# Altium PCB OptoGrid_Main_V0.05.pcbdoc
Units mil, origin at the board's own origin, x right, y up, seen from the top; angles counter-clockwise.
Board outline 409.45 x 625.98 mil, 2 copper layers (Top Layer, Bottom Layer); 21 components, 38 nets, 115 pads, 26 vias.
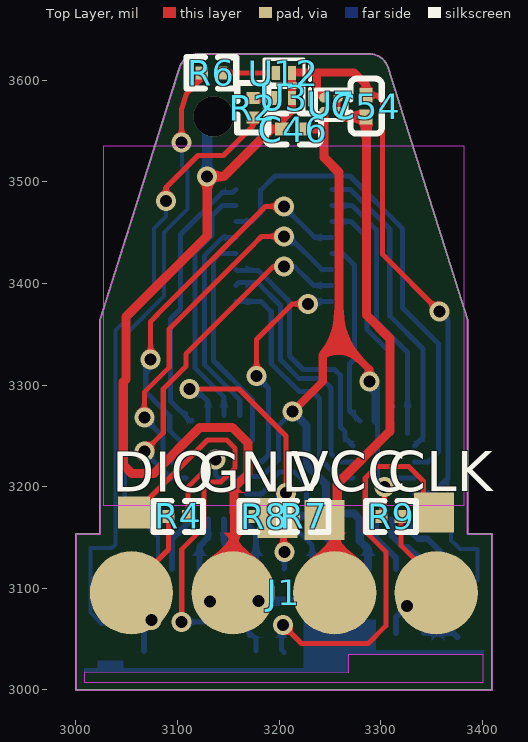
[diagram p0: Top Layer view]
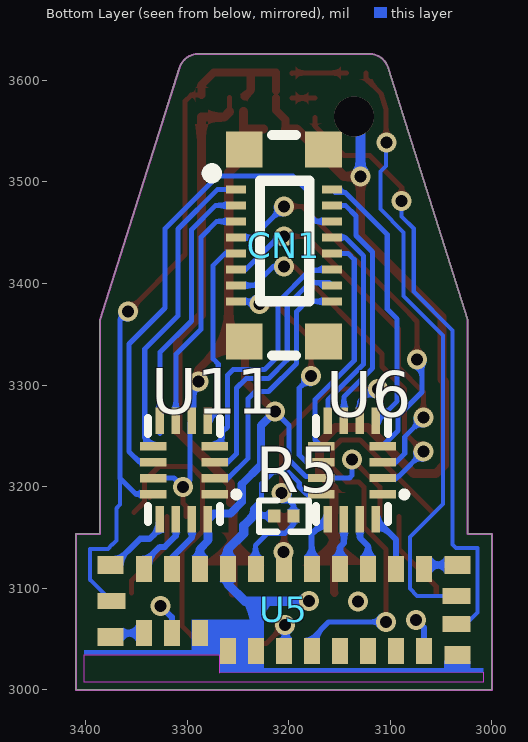
[diagram p1: Bottom Layer view, seen from below]

## Layer stack, top to bottom
Top Layer: signal copper (thickness not stored)
Dielectric: dielectric 12.6, FR-4, Dk 4.8
Bottom Layer: signal copper (thickness not stored)

## Board outline
3385.7,3363.89 3307.49,3612.21 ccw(c3288.71,3606.3) 3288.71,3625.98 3120.74,3625.98 ccw(c3120.74,3606.3) 3101.96,3612.21 3023.75,3363.89 3023.75,3153.54 3000,3153.54 3000,3000 3409.45,3000 3409.45,3153.54 3385.7,3153.54

## Design rules (kind name [scope] priority, off if disabled: settings)
BoardOutlineClearance copperThickness1oz [All] p0: genericclearance=10 ignorepadtopadclearanceinfootprint=FALSE except(0: Arc-SplitContinuation Track-SplitContinuation SMDPad-SplitContinuation THPad-SplitContinuation Via-SplitContinuation Fill-SplitContinuation Poly-SplitContinuation Region-SplitContinuation Text-SplitContinuation; 6: SMDPad-CutoutEdge THPad-CutoutEdge Via-CutoutEdge Fill-CutoutEdge Region-CutoutEdge; 11.8: Track-OutlineEdge SMDPad-OutlineEdge THPad-OutlineEdge Via-OutlineEdge Fill-OutlineEdge Region-OutlineEdge Poly-OutlineEdge Text-OutlineEdge Track-CutoutEdge)
BoardOutlineClearance copperThickness2oz [All] p0: genericclearance=10 ignorepadtopadclearanceinfootprint=FALSE except(0: Arc-SplitContinuation Track-SplitContinuation SMDPad-SplitContinuation THPad-SplitContinuation Via-SplitContinuation Fill-SplitContinuation Poly-SplitContinuation Region-SplitContinuation Text-SplitContinuation; 6: SMDPad-CutoutEdge THPad-CutoutEdge Via-CutoutEdge Fill-CutoutEdge Region-CutoutEdge; 11.8: Track-OutlineEdge SMDPad-OutlineEdge THPad-OutlineEdge Via-OutlineEdge Fill-OutlineEdge Region-OutlineEdge Poly-OutlineEdge Text-OutlineEdge Track-CutoutEdge)
Clearance copperThickness1oz [(InNet('VCC') OR InNet('GND') OR InNet('STATUS_LED') OR InNet('X4') OR InNet('Y2') OR InNet('Y3') OR InNet('X6') OR InNet('Y1') OR InNet('Y4') OR InNet('Y5') OR InNet('X8') OR InNet('Y6') OR InNet('Y7') OR InNet('X7') OR InNet('X5') OR InNet('Y8') OR InNet('X3') OR InNet('X2') OR InNet('X1') OR InNet('AX2') OR InNet('AX1') OR InNet('AX0') OR InNet('SHAM_LED') OR InNet('$1N29965') OR InNet('$1N29971') OR InNet('AY2') OR InNet('AY0') OR InNet('AY1') OR InNet('MUX_EN_PWM') OR InNet('BAT+') OR InNet('SWDCLK') OR InNet('SWDIO') OR InNet('CURRENT_SENSING_ADC') OR InNet('VBAT_ADC') OR InNet('$1N46797') OR InNet('$1N46842') OR InNet('SCL') OR InNet('SDA'))] p1: gap=7 ignorepadtopadclearanceinfootprint=FALSE except(3.9: Track-SMDPad; 4: Track-Track; 6: SMDPad-SMDPad Track-THPad SMDPad-THPad THPad-THPad Track-Via SMDPad-Via THPad-Via Via-Via Track-Fill SMDPad-Fill THPad-Fill Via-Fill Fill-Fill SMDPad-Region THPad-Region Via-Region Fill-Region Region-Region Track-Poly SMDPad-Poly THPad-Poly Via-Poly Fill-Poly Poly-Poly Track-Text SMDPad-Text THPad-Text Via-Text Fill-Text Region-Text Poly-Text Text-Text; 6.9: Track-Hole SMDPad-Hole THPad-Hole Via-Hole Fill-Hole Region-Hole Poly-Hole Text-Hole Sheet-Hole; 11.8: Track-Region Region-Poly Track-Sheet SMDPad-Sheet THPad-Sheet Via-Sheet Fill-Sheet Region-Sheet Poly-Sheet Text-Sheet)
Clearance copperThickness2oz [All] p1: gap=7 ignorepadtopadclearanceinfootprint=FALSE except(6: Track-SMDPad SMDPad-SMDPad Track-THPad SMDPad-THPad THPad-THPad Track-Via SMDPad-Via THPad-Via Via-Via Track-Fill SMDPad-Fill THPad-Fill Via-Fill Fill-Fill SMDPad-Region THPad-Region Via-Region Fill-Region Region-Region Track-Poly SMDPad-Poly THPad-Poly Via-Poly Fill-Poly Poly-Poly Track-Text SMDPad-Text THPad-Text Via-Text Fill-Text Region-Text Poly-Text Text-Text; 6.9: Track-Hole SMDPad-Hole THPad-Hole Via-Hole Fill-Hole Region-Hole Poly-Hole Text-Hole Sheet-Hole; 8: Track-Track; 11.8: Track-Region Region-Poly Track-Sheet SMDPad-Sheet THPad-Sheet Via-Sheet Fill-Sheet Region-Sheet Poly-Sheet Text-Sheet)
DiffPairsRouting differentialPair [All] p1: maxuncoupledlength=10 minlimit=6 maxlimit=6 mostfreqgap=6 toplayer_minwidth=5 toplayer_prefwidth=10 toplayer_maxwidth=100 bottomlayer_minwidth=5 bottomlayer_prefwidth=10 bottomlayer_maxwidth=100
PasteMaskExpansion pasteMaskExpansion [All] p1: expansion=0
PlaneConnect innerPlane [All] p1: planeconnectstyle=Relief reliefexpansion=20 reliefentries=4 reliefconductorwidth=10 reliefairgap=10
PolygonConnect copperRegion [All] p1: connectstyle=Relief reliefentries=4 reliefconductorwidth=10 polygonreliefangle="90 Angle" airgapwidth=10
RoutingVias viaSize [All] p1: viastyle="Through Hole" holewidth=12 minholewidth=11.8 maxholewidth=248 width=24 minwidth=19.7 maxwidth=393.7
SolderMaskExpansion solderMaskExpansion [All] p1: useseparateexpansions=TRUE expansion=2 expansionbottom=2
Width copperThickness1oz [All] p1: maxlimit=100 minlimit=4 preferedwidth=10
Width copperThickness2oz [All] p1: maxlimit=100 minlimit=8 preferedwidth=10

## Components (designator, comment, footprint, x,y, rotation, side; value= is the part's Value field where it differs from the comment)
C46 "GRM033R61A225KE47D" C0201 3214.05,3552 r0 top
C54 "GRM033R61A225KE47D" C0201 3285.72,3574.54 r90 top
CLK "Test-Point" Test-Point-0.5mm#1 3333.7,3182.3 r0 top
CN1 "YXT-BB10-16S-02" CONN-SMD_YXT-BB10-16S-02 3204.72,3437.55 r90 bottom locked
DIO "Test-Point" Test-Point-0.5mm#2 3081.28,3174.54 r0 top
GND "Test-Point" Test-Point-0.5mm#1 3179.81,3177.14 r0 top
J1 "811-22-004-30-002101" 811-22-004-30-002101 3204.72,3095.55 r180 top
R2 "RC0201FR-07220RL" R0201 3174.25,3572.9 r270 top
R4 "AF0201FR-074K7L" R0201 3100.72,3170.64 r0 top
R5 "0201WMF715JTEE" R0201 3204.72,3171.04 r180 bottom
R6 "NQ01WMJ0820TEE" R0201 3133.39,3607.27 r180 top
R7 "RC0201FR-071ML" R0201 3224.33,3170.65 r0 top
R8 "RC0201FR-071ML" R0201 3185.47,3170.65 r0 top
R9 "AF0201FR-074K7L" R0201 3310.32,3170.64 r180 top
U3 "RED LED" BLUE_LED_KINGBRIGHT_0201 3204.72,3582.65 r180 top
U5 "HY0020" HY0020_footprint_NoFilling 3204.72,3076.64 r180 bottom locked
U6 "TMUX1208RSVR" UTQFN-16_L2.6-W1.8-P0.40-BL 3137.8,3216.36 r90 bottom locked
U7 "NCP163AFCT330T2G" WLCSP-4_L0.6-W0.6-P0.35-R2-C2-TL 3251.22,3575.94 r180 top
U11 "TMUX1208RSVR" UTQFN-16_L2.6-W1.8-P0.40-BL 3303.07,3216.34 r90 bottom locked
U12 "BLUE LED" BLUE_LED_KINGBRIGHT_0201 3204.72,3606.94 r180 top
VCC "Test-Point" Test-Point-0.5mm#1 3226.17,3174.81 r0 top

## Footprints (in the part's own frame and the unit in brackets; to place one, negate y for a bottom-side part, rotate by r counter-clockwise, add the part's x,y. Pads: shape width x height; smd on the part's side, far side on the other; paste and mask are expansions set on the pad)
811-22-004-30-002101 [mm]
  round 2.08 smd: 1(-3.81,0) 2(-1.27,0) 3(1.27,0) 4(3.81,0)
BLUE_LED_KINGBRIGHT_0201 [mm]
  rect 0.2x0.35 smd: 1(-0.2,0) 2(0.2,0)
  silkscreen extent -0.65,-0.35 0.5,0.35
C0201 [mil]
  rect 14.51x12.76 smd: 1(-10.8,0) 2(10.8,0)
  silkscreen extent -27,-15 27,15
CONN-SMD_YXT-BB10-16S-02 [mm]
  rect 0.2x0.5 smd: 1(1.4,1.2) 2(1.4,-1.2) 3(1,1.2) 4(1,-1.2) 5(0.6,1.2) 6(0.6,-1.2) 7(0.2,1.2) 8(0.2,-1.2) 9(-0.2,1.2) 10(-0.2,-1.2) 11(-0.6,1.2) 12(-0.6,-1.2) 13(-1,1.2) 14(-1,-1.2) 15(-1.4,1.2) 16(-1.4,-1.2)
  rect 0.9x0.92 smd: 17(-2.4,0.99) 18(-2.4,-0.99) 19(2.4,0.99) 20(2.4,-0.99)
  silkscreen extent -2.76,-0.64 2.76,1.93
HY0020_footprint_NoFilling [mm]
  rect 0.4x0.65 smd: 1(-3.5,1.075) 2(-2.8,1.075) 3(-2.1,1.075) 4(-1.4,1.075) 5(-0.7,1.075) 6(0,1.075) 7(0.7,1.075) 8(1.4,1.075) 9(2.1,1.075) 10(2.8,1.075) 11(3.5,1.075) 16(3.5,-0.975) 17(2.8,-0.975) 18(2.1,-0.975) 19(1.4,-0.975) 20(0.7,-0.975) 21(0,-0.975) 22(-0.7,-0.975) 23(-1.4,-0.975) 24(-2.1,-0.525) 25(-2.8,-0.525) 26(-3.5,-0.525)
  rect 0.65x0.45 smd: 12(4.335,1.175) 15(4.335,-1.075) 27(-4.335,-0.625) 29(-4.335,1.175)
  rect 0.7x0.4 smd: 13(4.31,0.4) 14(4.31,-0.3) 28(-4.31,0.275)
  Board Outline Layer region: -4.987,-1.733 -4.986,-1.063 -4.983,-1.063 -1.613,-1.063 -1.613,-1.067 -1.613,-1.514 4.986,-1.512 4.986,-1.734 4.986,-1.754 -4.987,-1.755
R0201 [mil]
  rect 11.93x12.76 smd: 1(-9.51,0) 2(9.51,0)
  silkscreen extent -24,-15 24,15
Test-Point-0.5mm#1 [mm]
  rect 1x1 smd: 1(0.474,-0.197)
Test-Point-0.5mm#2 [mm]
  rect 0.8x0.8 smd: 1(-0.614,0)
UTQFN-16_L2.6-W1.8-P0.40-BL [mm]
  rect 0.21x0.665 smd: 1(-0.6,-0.768) 2(-0.2,-0.768) 3(0.2,-0.768) 4(0.6,-0.768) 9(0.6,0.768) 10(0.2,0.768) 11(-0.2,0.768) 12(-0.6,0.768)
  rect 0.665x0.21 smd: 5(1.232,-0.6) 6(1.232,-0.2) 7(1.232,0.2) 8(1.232,0.6) 13(-1.232,0.6) 14(-1.232,0.2) 15(-1.232,-0.2) 16(-1.232,-0.6)
  silkscreen extent -1.3,-1.38 1.3,0.9
WLCSP-4_L0.6-W0.6-P0.35-R2-C2-TL [mm]
  round 0.25 smd: A1(-0.175,0.175) A2(0.175,0.175) B1(-0.175,-0.175) B2(0.175,-0.175)
  silkscreen extent -0.38,-0.38 0.38,0.38

## Via types
v1: diameter 19.68, hole 11.81, Top Layer to Bottom Layer, 25 vias
v2: diameter 39.37, hole 39.37, Top Layer to Bottom Layer, 1 vias

## Nets (pads, with @x,y where several pads share a name; then routed paths per layer and width w, separated by ;. In a path a pad name is that pad's centre, name@x,y a point inside that pad or via, vN(x,y) a via of type N, cw(c..) or ccw(c..) an arc to the next point about the centre after c; other vN are vias at no path point)
$1N29965: U5.26 U5.27 | length 34.5
  Bottom Layer w6: U5.26 3371.46,3055.97 U5.27
$1N29971: U5.11 U5.12 | length 34.5
  Bottom Layer w6: U5.12 3062.99,3122.9 U5.11
$1N46797: R2.1 U3.2 | length 22.7
  Top Layer w5: R2.1 3196.62,3582.41 U3.2
$1N46842: R6.1 U12.2 | length 54.1
  Top Layer w5: R6.1 3196.51,3607.27 U12.2
AX0: U5.9 U6.15 | length 52.3
  Bottom Layer w6: U5.9 3121.82,3119.18 3121.82,3141.54 3129.93,3149.64 U6.15
AX1: U5.8 U6.14 | length 50.5
  Bottom Layer w6: U6.14 3145.67,3144.39 3149.61,3140.45 U5.8
AX2: U5.7 U6.13 | length 56.5
  Bottom Layer w6: U6.13 3163.11,3167.85 3177.32,3153.64 3177.32,3119.12 U5.7
AY0: U5.2 U11.15 | length 57.1
  Bottom Layer w6: U11.15 3295.2,3149.86 3314.96,3130.1 U5.2
AY1: U5.1 U11.14 | length 64.9
  Bottom Layer w6: U11.14 3310.94,3151.62 3321.82,3140.74 3326.82,3140.74 3342.52,3125.04 U5.1
AY2: U5.29 U11.13 | length 72.6
  Bottom Layer w6: U11.13 3326.69,3158.87 3336.82,3148.74 3346.11,3148.74 3371.96,3122.9 U5.29
BAT+: C54.1 J1.2 R7.2 U7.A1 U7.B1 VCC.1 | length 533.2
  Top Layer w5: U7.A1 U7.B1
  Top Layer w9: VCC.1@3254.33,3174.54 3254.72,3174.14 J1.2 ; VCC.1@3257.2,3184.41 3257.2,3202.6 3309.12,3254.52 3309.12,3345.84 3285.92,3369.04 3285.92,3563.74 3263.55,3563.74 U7.A1@3258.24,3569.05
CURRENT_SENSING_ADC: R5.2 U5.5 U6.6 | length 317.7
  Top Layer w5: v1(3111.97,3296.17) 3160.59,3296.17 3206.9,3249.86 v1(3206.9,3193.54)
  Bottom Layer w5: v1(3111.97,3296.17) 3117.99,3296.17 3129.93,3284.24 U6.6 ; v1(3206.9,3193.54) 3195.21,3181.85 R5.2 3195.21,3162.75 3203.84,3154.12 3220.74,3154.12 3232.62,3142.24 3232.62,3119.3 U5.5
GND: C46.1 C54.2 CN1.20 GND.1 J1.3 R5.1 R8.1 U3.1 U5.4 U5.15 U5.22 U5.23 U5.24 U5.28 U6.12 U7.B2 U11.12 U12.1 | length 1888.1
  Top Layer w5: C54.2@3288.92,3585.34 3296,3585.34 3301.93,3579.4 3301.93,3428.47 v1(3357.98,3372.42)
  Top Layer w8: J1.3 3155.51,3096.34 3155.51,3174.54 ; C46.1 3203.25,3561.17 3212.6,3570.51 U3.1 ; 3212.6,3589.65 3212.6,3607.48 3273.78,3607.48 3285.72,3595.54 C54.2 ; 3237.27,3591.12 3237.27,3605.85 3237.55,3606.13 ; 3237.51,3589.65 U7.B2@3243.25,3583.91
  Top Layer w9: 3155.51,3174.54 3155.51,3198.85 3169.52,3212.86 3169.52,3242.64 3153.82,3258.34 3122.22,3258.34 3076.72,3212.84 3055.22,3212.84 3046.62,3221.44 3046.62,3303.14 3049.22,3305.74 3049.22,3367.04 3129.28,3447.09 v1(3129.28,3505.31) 3145.55,3505.31 3192.23,3552 C46.1
  Bottom Layer w4: 3365.82,3207.94 3365.82,3182.34 3369.42,3178.74 3369.42,3147.01 3373.49,3142.94 3373.84,3142.94 3378.02,3138.76 3395.33,3138.76 3395.33,3108.39 U5.28
  Bottom Layer w5: U6.12 3182.61,3192.73 3189.59,3199.7 3189.59,3203.8 3200.02,3214.24 3215.52,3214.24 3226.82,3202.94 3226.82,3187.24 3235.22,3178.84 3235.22,3170.71 ; R5.1@3216.96,3171.31 3234.62,3171.31 3235.22,3170.71 ; 3236.84,3169.1 3235.22,3170.71 ; U11.12 3350.6,3192.71 3365.82,3207.94 3366.12,3208.24 3366.12,3364.27 v1(3357.98,3372.42)
  Bottom Layer w9: v1(3179.74,3087.25) 3232.17,3087.25 ; U5.22 3232.17,3038.36 3232.17,3087.25 ; 3236.84,3169.1 3244.22,3161.71 3244.22,3153.94 3259.84,3138.32 U5.4 3259.84,3104.15 ; 3259.82,3104.14 3242.94,3087.25 3232.17,3087.25
  Bottom Layer w10: v1(3129.28,3505.31) 3129.28,3557.93 v2(3135.7,3564.35)
  other v1: 3131.8,3087.11
MUX_EN_PWM: U5.10 U6.16 | length 57
  Bottom Layer w6: U5.10 3094.49,3148.16 U6.16
SCL: J1.1 R9.1 U5.25 | length 120.8
  Top Layer w5: R9.1 3319.83,3142.33 3354.72,3107.44 J1.1
  Bottom Layer w6: U5.25 3314.96,3071.46 v1(3326.09,3082.59)
SDA: J1.4 R4.1 U5.16 | length 123.9
  Top Layer w5: J1.4 3054.72,3101.74 3091.21,3138.23 R4.1
  Bottom Layer w6: U5.16 3066.93,3061.16 v1(3074.57,3068.8)
SHAM_LED: R6.2 U5.13 | length 605.1
  Top Layer w5: v1(3103.82,3538.65) 3104.12,3538.95 3104.12,3571.44 3108.98,3586.84 3123.88,3601.75 R6.2
  Bottom Layer w4: U5.13@3034.84,3092.38 3073.5,3092.38 3080.71,3099.59 3080.71,3150.25 3048.12,3182.84 3048.12,3348.94 3086.92,3387.74 3086.92,3450.34 3109.72,3473.14 3109.72,3510.14 3104.32,3515.54 3104.32,3537.95 v1@3103.62,3538.65
STATUS_LED: R2.2 U5.14 | length 606.2
  Top Layer w5: v1(3088.72,3481.34) 3088.72,3494.54 3120.22,3526.04 3145.42,3526.04 3174.25,3554.87 R2.2
  Bottom Layer w4: U5.14 3025.44,3064.82 3014.27,3075.99 3014.27,3139.74 3035.33,3139.74 3038.84,3143.25 3038.84,3353.85 3076.87,3391.89 3076.87,3454.19 3088.72,3466.04 v1(3088.72,3481.34)
SWDCLK: CLK.1 U5.21 | length 403.9
  Top Layer w5: v1(3203.74,3064.04) 3222.14,3045.64 3287.72,3045.64 3305.12,3063.04 3305.12,3135.84 3284.82,3156.14 3284.82,3208.64 3295.92,3219.74 3327.72,3219.74 3341.92,3205.54 3341.92,3184.97 CLK.1 ; CLK.1@3336.96,3189.17 CLK.1@3336.96,3189.94
  Bottom Layer w5: v1@3202.48,3065.93 3202.48,3039.49 U5.21@3205,3036.97
SWDIO: DIO.1 U5.20 | length 424.2
  Top Layer w5: DIO.1 3058.22,3174.54 3129.62,3245.94 3148.52,3245.94 3156.82,3237.64 3156.82,3218.64 3142.96,3204.77 3131.19,3204.77 3125.92,3199.5 3125.92,3160.04 3104.2,3138.31 v1(3104.2,3066.84)
  Bottom Layer w5: v1(3104.2,3066.84) 3160.72,3066.84 3177.17,3050.39 U5.20
VBAT_ADC: R7.1 R8.2 U5.6 | length 72.1
  Top Layer w6: R8.2 3204.35,3170.65 ; v1(3205.17,3135.79) 3204.35,3136.61 3204.35,3170.65 ; R7.1 3204.35,3170.65
  Bottom Layer w5: U5.6 3205.17,3119.41 v1(3205.17,3135.79)
VCC: C46.2 R4.2 R9.2 U5.3 U6.11 U7.A2 U11.6 U11.11 U11.16 | length 969.2
  Top Layer w5: R4.2 3110.23,3199.43 v1(3137.46,3226.66) ; R9.2 3300.81,3180.51 3303.88,3183.58 v1(3303.88,3199.49)
  Top Layer w8: v1(3213.42,3273.94) 3243.02,3303.54 3243.02,3329.3 3259.02,3345.3 3288.8,3315.52 v1(3288.8,3303.45)
  Top Layer w9: C46.2 3243.91,3552 3244.33,3552.43 ; U7.A2 3244.33,3552.43 ; 3259.02,3345.3 3259.02,3509.24 3244.33,3523.93 3244.33,3552.43
  Bottom Layer w5: v1(3137.46,3226.66) 3137.46,3211.1 3140.08,3208.48 U6.11 3169.39,3209.84 3182.87,3209.84 3199.62,3226.59 3199.62,3260.14 v1(3213.42,3273.94) ; U11.6 3297.02,3263.02 3297.02,3206.35 v1(3303.88,3199.49) 3312.88,3208.49 U11.11
  Bottom Layer w8: v1(3213.42,3273.94) 3227.12,3260.24 3227.12,3221.34 3246.12,3202.34 3246.12,3184.84 3257.32,3173.64 3273.64,3173.64 U11.16 3279.45,3146.71 3287.4,3138.76 U5.3 ; v1(3288.8,3303.45) 3295.2,3297.04 U11.6
X1: CN1.2 U6.5 | length 270.1
  Bottom Layer w5: U6.5 3112.5,3264.85 3093.22,3284.12 3093.22,3365.14 3102.92,3374.84 3102.92,3448.29 3143.97,3489.34 3154.15,3489.34 CN1.2
X2: CN1.4 U6.7 | length 242.6
  Bottom Layer w5: U6.7@3145.62,3270.3 3145.62,3288.44 3117.39,3316.67 3117.39,3430.93 3133.72,3447.26 3133.72,3466.34 3144.3,3476.91 CN1.4
X3: CN1.8 U6.8 | length 210
  Bottom Layer w5: CN1.8 3144.63,3445.42 3126.41,3427.2 3126.41,3320.4 3161.32,3285.49 U6.8@3161.32,3270.3
X4: CN1.10 U6.9 | length 226.6
  Bottom Layer w5: CN1.10 3141.64,3429.67 3135.42,3423.46 3135.42,3324.14 3174.03,3285.53 3174.03,3245.97 U6.9
X5: CN1.7 U6.4 | length 378.8
  Top Layer w5: v1(3073.6,3325.2) 3073.6,3362.59 3080.94,3369.93 3080.94,3370.23 3186.54,3475.84 v1@3204.8,3475.84
  Bottom Layer w5: v1(3073.6,3325.2) 3068.82,3320.43 3068.82,3293.24 3092.42,3269.64 3092.42,3255.1 U6.4 ; v1(3204.72,3475.84) 3235.14,3445.42 CN1.7
X6: CN1.15 U6.10 | length 232.7
  Top Layer w5: v1(3177.87,3308.75) 3177.87,3344.78 3212.94,3379.85 v1(3228.7,3379.85)
  Bottom Layer w5: U6.10 3182.7,3224.22 3189.61,3231.12 3189.61,3297.01 v1(3177.87,3308.75) ; v1(3228.7,3379.85) 3231.28,3382.42 CN1.15
X7: CN1.11 U6.3 | length 377
  Top Layer w5: v1(3067.4,3268.07) 3067.4,3292.92 3091.92,3317.44 3091.92,3355.19 3175.53,3438.79 3175.53,3439.02 3182.77,3446.27 v1(3204.7,3446.27)
  Bottom Layer w5: v1(3067.4,3268.07) 3067.4,3267.37 3085.72,3249.05 3085.72,3232.58 3094.09,3224.22 U6.3 ; v1(3204.7,3446.27) 3209.6,3446.27 3241.94,3413.92 CN1.11
X8: CN1.13 U6.2 | length 351.7
  Top Layer w5: v1(3067.4,3234.46) 3086.02,3253.08 3086.02,3296.14 3108.22,3318.34 3108.22,3330.54 3194.54,3416.85 v1@3204.5,3416.85
  Bottom Layer w5: v1(3067.4,3234.46) 3090.77,3211.1 3090.99,3211.1 3093.64,3208.44 U6.2@3108.48,3208.44 ; v1(3204.72,3416.54) 3215.42,3416.54 3233.79,3398.17 CN1.13
Y1: CN1.1 U11.9 | length 303.7
  Bottom Layer w5: CN1.1 3269.8,3492.66 3308.92,3453.54 3308.92,3368.24 3341.62,3335.54 3341.62,3248.27 U11.9
Y2: CN1.3 U11.8 | length 266.8
  Bottom Layer w5: CN1.3 3271.78,3476.91 3295.72,3452.97 3295.72,3363.14 3326.52,3332.34 U11.8@3326.52,3252.57
Y3: CN1.5 U11.7 | length 231.7
  Bottom Layer w5: CN1.5@3252.01,3461.12 3270.85,3461.12 3286.37,3445.6 3286.37,3354.84 3310.82,3330.38 3310.82,3283.05 3310.94,3282.94 U11.7
Y4: CN1.6 U11.10 | length 479.2
  Bottom Layer w5: CN1.6 3173.15,3461.16 3181.92,3469.94 3181.92,3491.84 3195.92,3505.84 3269.72,3505.84 3321.62,3453.94 3321.62,3375.94 3357.11,3340.45 3357.11,3234.42 3346.89,3224.2 U11.10
Y5: CN1.9 U11.5 | length 186.5
  Bottom Layer w5: CN1.9 3262.45,3429.67 3274.3,3417.82 3274.3,3325.84 3269.3,3320.84 3269.3,3274.97 U11.5
Y6: CN1.14 U11.3 | length 259.2
  Bottom Layer w5: CN1.14 3160.38,3401.07 3178.64,3401.07 3201.36,3378.35 3201.36,3324.83 3219.87,3306.32 3242.07,3306.32 3251.26,3297.14 3251.26,3232.3 3259.36,3224.2 U11.3
Y7: CN1.16 U11.2 | length 251.8
  Bottom Layer w5: CN1.16 3182.14,3382.42 3192.34,3372.22 3192.34,3321.09 3219.8,3293.64 3232.92,3293.64 3239.82,3286.74 3239.82,3227.98 3259.37,3208.44 U11.2@3272.81,3208.44
Y8: CN1.12 U11.4 | length 252.3
  Bottom Layer w5: CN1.12 3158.47,3412.94 3179.52,3412.94 3210.37,3382.09 3210.37,3328.56 3223.6,3315.34 3254.62,3315.34 3260.29,3309.67 3260.29,3258.67 3265.02,3253.94 3265.02,3247.76 U11.4
pads on no net: CN1.17 CN1.18 CN1.19 U5.17 U5.18 U5.19 U6.1 U11.1

## Keep-outs
Top Layer:
  region: 3027.58,3535.49 3381.91,3535.49 3381.91,3181.16 3027.58,3181.16
Board Outline Layer:
  the board outline again, w1.97

## Other copper
Top Layer:
  region net SHAM_LED: 3122.9,3597.23 3113.4,3594.8 ccw(c3095.1,3613.1) 3117.92,3600.89 3129.85,3600.89 ccw(c3132.27,3587.87)
  region net $1N46842: 3156.37,3609.77 3156.37,3604.77 ccw(c3156.37,3595.39) 3148.87,3601.02 3148.87,3613.52 ccw(c3156.37,3619.14)
  region net GND: 3281.72,3595.54 3289.72,3595.54 ccw(c3292.74,3595.54) 3292.1,3592.59 3279.35,3592.59 ccw(c3278.71,3595.54)
  region net GND: 3296,3587.84 3296,3582.84 ccw(c3296,3578.94) 3292.1,3579.09 3292.1,3591.59 ccw(c3296,3591.73)
  region net GND: 3237.33,3584.17 3242.99,3589.83 3244.52,3588.5 3245.92,3587.55 3247.06,3586.86 3247.81,3586.31 3240.85,3579.35 3240.3,3580.11 3239.61,3581.24 3238.66,3582.64
  region net GND: 3151.01,3198.85 3160.01,3198.85 ccw(c3166.76,3201.46) 3166.76,3194.22 3144.26,3194.22 ccw(c3144.26,3201.46)
  region net GND: 3159.51,3142.85 3151.51,3142.85 ccw(c3136.51,3142.85) 3145.51,3154.85 3165.51,3154.85 ccw(c3174.51,3142.85)
  region net VBAT_ADC: 3204.35,3167.65 3204.35,3173.65 ccw(c3204.35,3178.34) 3208.85,3177.03 3208.85,3164.27 ccw(c3204.35,3162.96)
  region net VBAT_ADC: 3204.35,3173.65 3204.35,3167.65 ccw(c3204.35,3164.25) 3200.95,3164.27 3200.95,3177.03 ccw(c3204.35,3177.05)
  region net GND: 3151.51,3151.88 3159.51,3150.7 3159.74,3148.78 3160.38,3146.85 3161.39,3144.93 3162.71,3143.01 3164.31,3141.09 3166.13,3139.2 3170.25,3135.46 3179.03,3128.37 3182.91,3125.09 3184.56,3123.53 3185.95,3122.04 3124.54,3123.22 3127.64,3126.15 3131.6,3129.4 3136.04,3132.89 3140.56,3136.57 3144.76,3140.37 3146.61,3142.29 3148.25,3144.23 3149.6,3146.16 3150.63,3148.09 3151.28,3150
  region net $1N46797: 3185.41,3579.91 3185.41,3584.91 ccw(c3185.41,3594.29) 3192.91,3588.66 3192.91,3584.91 3192.91,3579.91 3192.91,3576.16 ccw(c3185.41,3570.54)
  region net $1N46842: 3185.41,3604.77 3185.41,3609.77 ccw(c3185.41,3619.14) 3192.91,3613.52 3192.91,3609.77 3192.91,3604.77 3192.91,3601.02 ccw(c3185.41,3595.39)
  region net X5: 3071.1,3338.6 3076.1,3338.6 3076.21,3337.36 3076.52,3336.35 3077,3335.53 3077.62,3334.81 3079.19,3333.43 3080.98,3331.71 3066.22,3331.71 3068.01,3333.43 3069.57,3334.81 3070.2,3335.53 3070.68,3336.35 3070.99,3337.36
  region net X7: 3064.9,3281.47 3069.9,3281.47 3070.01,3280.23 3070.32,3279.22 3070.81,3278.4 3071.43,3277.68 3072.99,3276.3 3074.79,3274.58 3060.02,3274.58 3061.82,3276.3 3063.38,3277.68 3064,3278.4 3064.48,3279.22 3064.79,3280.23
  region net X8: 3075.11,3245.71 3078.65,3242.17 3077.85,3241.21 3077.36,3240.29 3077.11,3239.36 3077.05,3238.41 3077.18,3236.33 3077.23,3233.85 3066.79,3244.29 3069.28,3244.24 3071.35,3244.1 3072.3,3244.17 3073.23,3244.42 3074.16,3244.9
  region net VCC: 3284.8,3315.52 3292.8,3315.52 3292.87,3314.63 3293.09,3313.84 3293.85,3312.5 3296.18,3309.96 3281.42,3309.96 3283.74,3312.5 3284.51,3313.84 3284.72,3314.63
  region net X5: 3191.32,3473.34 3191.32,3478.34 3192.57,3478.45 3193.57,3478.76 3194.4,3479.24 3195.12,3479.86 3196.49,3481.43 3198.21,3483.22 3198.21,3468.45 3196.49,3470.25 3195.12,3471.81 3194.4,3472.43 3193.57,3472.92 3192.57,3473.23
  region net X7: 3191.3,3443.77 3191.3,3448.77 3192.55,3448.88 3193.55,3449.19 3194.38,3449.67 3195.09,3450.29 3196.47,3451.86 3198.19,3453.65 3198.19,3438.88 3196.47,3440.68 3195.09,3442.24 3194.38,3442.87 3193.55,3443.35 3192.55,3443.66
  region net X8: 3194.54,3414.35 3194.54,3419.35 3195.18,3419.51 3195.74,3419.93 3196.66,3421.29 3197.5,3422.87 3197.95,3423.57 3198.45,3424.12 3197.98,3409.36 3197.53,3409.94 3197.14,3410.67 3196.45,3412.32 3195.66,3413.75 3195.15,3414.19
  region net X6: 3215.3,3377.35 3215.3,3382.35 3216.54,3382.46 3217.54,3382.77 3218.37,3383.25 3219.09,3383.87 3220.46,3385.44 3222.19,3387.23 3222.19,3372.47 3220.46,3374.26 3219.09,3375.82 3218.37,3376.45 3217.54,3376.93 3216.54,3377.24
  region net GND: 3346.74,3380.12 3350.27,3383.66 3351.23,3382.86 3352.16,3382.37 3353.08,3382.12 3354.03,3382.06 3356.11,3382.19 3358.6,3382.24 3348.16,3371.8 3348.21,3374.29 3348.34,3376.36 3348.27,3377.31 3348.03,3378.24 3347.54,3379.17
  region net SWDCLK: 3214.98,3056.33 3211.45,3052.79 3210.49,3053.59 3209.56,3054.08 3208.64,3054.33 3207.69,3054.4 3205.61,3054.26 3203.12,3054.21 3213.56,3064.65 3213.52,3062.17 3213.38,3060.09 3213.45,3059.14 3213.69,3058.21 3214.18,3057.28
  region net GND: 3133.78,3491.91 3124.78,3491.91 3124.53,3493.68 3123.88,3495.56 3122.95,3497.34 3121.9,3498.8 3136.66,3498.8 3135.6,3497.34 3134.68,3495.56 3134.03,3493.68
  region net GND: 3142.68,3509.81 3142.68,3500.81 3140.91,3500.57 3139.03,3499.91 3137.25,3498.99 3135.79,3497.93 3135.79,3512.7 3137.25,3511.64 3139.03,3510.72 3140.91,3510.06
  region net X6: 3175.37,3322.15 3180.37,3322.15 3180.47,3320.91 3180.78,3319.91 3181.27,3319.08 3181.89,3318.36 3183.45,3316.99 3185.25,3315.26 3170.48,3315.26 3172.28,3316.99 3173.84,3318.36 3174.46,3319.08 3174.95,3319.91 3175.26,3320.91
  region net SHAM_LED: 3101.62,3552.27 3106.62,3551.82 3106.73,3550.57 3107.03,3549.57 3107.51,3548.76 3108.12,3548.06 3109.65,3546.7 3111.4,3544.93 3096.64,3545.39 3098.47,3547.07 3100.07,3548.46 3100.71,3549.2 3101.2,3550.04 3101.51,3551.04
  region net STATUS_LED: 3086.22,3494.54 3091.22,3494.54 3091.33,3493.3 3091.64,3492.32 3092.13,3491.53 3092.75,3490.84 3094.31,3489.54 3096.11,3487.85 3081.34,3487.85 3083.14,3489.54 3084.7,3490.84 3085.32,3491.53 3085.8,3492.32 3086.11,3493.3
  region net VCC: 3254.52,3373.45 cw(c3187.76,3373.45) 3240.2,3332.12 3245.85,3326.47 cw(c3258.48,3305.15) 3276,3322.67 3282.62,3327.36 cw(c3328.71,3373.45) 3263.52,3373.45
  region net VBAT_ADC: 3201.35,3149.65 ccw(c3171.35,3149.65) 3195.35,3167.65 3204.35,3170.65 3213.35,3167.65 ccw(c3237.35,3149.65) 3207.35,3149.65
  region net VBAT_ADC: 3201.35,3148.55 3207.35,3149.79 3207.45,3148.66 3207.75,3147.67 3208.2,3146.78 3208.8,3145.97 3210.28,3144.46 3211.98,3142.9 3197.27,3141.66 3198.77,3143.41 3200.07,3144.85 3200.6,3145.59 3201,3146.41 3201.26,3147.38
  region net $1N46797: 3188.13,3584.91 3188.13,3579.91 ccw(c3188.13,3570.06) 3180.63,3576.44 3180.63,3588.38 ccw(c3188.13,3594.76)
  region net STATUS_LED: 3176.75,3554.87 3171.75,3554.87 ccw(c3168,3553.4) 3168,3557.42 3180.5,3557.42 ccw(c3180.5,3553.4)
  region net BAT+: 3265.85,3559.24 3265.85,3568.24 ccw(c3265.85,3602.72) 3279.35,3570.99 3279.35,3556.48 ccw(c3265.85,3524.75)
  region net BAT+: 3290.42,3542.98 3281.42,3542.98 ccw(c3236.53,3542.98) 3279.35,3556.48 3292.1,3556.48 ccw(c3345.57,3542.98)
  region net BAT+: 3250.22,3151.3 3259.22,3151.3 3259.45,3149.42 3260.08,3147.52 3261.08,3145.61 3262.4,3143.68 3263.98,3141.75 3265.79,3139.83 3269.87,3136.04 3274.26,3132.36 3278.57,3128.85 3282.43,3125.59 3285.43,3122.63 3224.02,3122.63 3227.02,3125.59 3230.88,3128.85 3235.19,3132.36 3239.58,3136.04 3243.66,3139.83 3245.47,3141.75 3247.05,3143.68 3248.37,3145.61 3249.37,3147.52 3250,3149.42
  region net BAT+: 3259.22,3141.35 3250.22,3141.35 ccw(c3233.35,3141.35) 3243.47,3154.85 3265.97,3154.85 ccw(c3276.1,3141.35)
Bottom Layer:
  region net GND: 3021.35,3028.57 3046.75,3028.57 3046.75,3017.52 3021.35,3017.52
  region net GND: 3295.03,3038.83 3401.32,3038.83 3401.32,3035.13 3295.03,3035.13
  region net GND: 3008.39,3021.42 3226.83,3021.42 3226.83,3017.42 3008.39,3017.42
  region net GND: 3224.53,3017.44 3224.53,3068.82 3295.32,3068.82 3295.32,3035.15 3267.87,3035.15 3267.87,3017.39
  region net X1: 3143.97,3486.84 3143.97,3491.84 ccw(c3143.88,3495.59) 3147.64,3495.59 3147.64,3488.73 ccw(c3147.64,3484.24)
  region net Y2: 3269.31,3479.41 3269.31,3474.41 ccw(c3269.31,3454.12) 3261.81,3472.98 3261.81,3480.85 ccw(c3269.31,3499.7)
  region net Y3: 3269.31,3463.62 3269.31,3458.62 ccw(c3269.31,3437.78) 3261.81,3457.23 3261.81,3465.1 ccw(c3269.31,3483.39)
  region net Y4: 3173.15,3463.66 3173.15,3458.66 ccw(c3173.15,3446.11) 3167.32,3457.23 3167.32,3465.1 ccw(c3173.15,3476.22)
  region net X5: 3235.14,3442.92 3235.14,3447.92 ccw(c3235.14,3465.63) 3242.12,3449.36 3242.12,3441.49 ccw(c3235.14,3425.21)
  region net X3: 3144.63,3442.92 3144.63,3447.92 ccw(c3144.63,3451.77) 3147.64,3449.36 3147.64,3441.49 ccw(c3144.63,3439.07)
  region net Y5: 3262.45,3432.17 3262.45,3427.17 ccw(c3263.75,3425.74) 3261.81,3425.74 3261.81,3433.61 ccw(c3263.75,3433.61)
  region net X7: 3241.94,3411.42 3241.94,3416.42 ccw(c3236.47,3417.86) 3242.12,3417.86 3242.12,3409.99 ccw(c3236.47,3409.99)
  region net Y8: 3174.82,3415.44 3174.82,3410.44 ccw(c3174.82,3347.6) 3167.32,3409.99 3167.32,3417.86 ccw(c3174.82,3428.25)
  region net X8: 3234.62,3395.67 3234.62,3400.67 ccw(c3234.62,3420.96) 3242.12,3402.11 3242.12,3394.24 ccw(c3234.62,3375.38)
  region net Y6: 3174.82,3403.57 3174.82,3398.57 ccw(c3174.82,3389.2) 3167.32,3394.82 3167.32,3402.11 ccw(c3167.32,3422.07)
  region net X6: 3234.62,3379.92 3234.62,3384.92 ccw(c3234.62,3405.21) 3242.12,3386.36 3242.12,3378.49 ccw(c3234.62,3359.63)
  region net Y7: 3174.82,3384.92 3174.82,3379.92 ccw(c3174.82,3359.63) 3167.32,3378.49 3167.32,3386.36 ccw(c3174.82,3405.21)
  region net X8: 3093.64,3205.94 3093.64,3210.94 ccw(c3092.37,3212.61) 3094.47,3212.61 3094.47,3204.34 ccw(c3092.5,3204.34)
  region net X7: 3094.09,3221.72 3094.09,3226.72 ccw(c3090.79,3228.35) 3094.47,3228.35 3094.47,3220.08 ccw(c3090.79,3220.08)
  region net X1: 3106.1,3267.71 3103.38,3277.5 ccw(c3114.42,3288.54) 3110.04,3273.55 3110.04,3261.05 ccw(c3095.06,3256.67)
  region net CURRENT_SENSING_ADC: 3127.43,3284.24 3132.43,3284.24 ccw(c3145.3,3284.24) 3134.06,3277.96 3125.79,3277.96 ccw(c3114.55,3284.24)
  region net X2: 3143.12,3285.46 3148.12,3285.46 ccw(c3165.75,3285.46) 3149.8,3277.96 3141.53,3277.96 ccw(c3124.67,3285.46)
  region net X6: 3182.7,3226.72 3182.7,3221.72 ccw(c3182.76,3220.08) 3181.12,3220.08 3181.12,3228.35 ccw(c3182.76,3228.35)
  region net GND: 3182.61,3195.23 3182.61,3190.23 ccw(c3182.76,3188.59) 3181.12,3188.59 3181.12,3196.86 ccw(c3182.76,3196.86)
  region net AX2: 3170.28,3164.92 3173.54,3153.18 ccw(c3160.29,3139.93) 3165.55,3157.91 3165.55,3172.91 ccw(c3183.53,3178.17)
  region net AX1: 3148.67,3145.76 3142.67,3145.76 ccw(c3106.38,3145.76) 3141.53,3154.76 3149.8,3154.76 ccw(c3184.95,3145.76)
  region net AX0: 3132.93,3149.64 3126.93,3149.64 ccw(c3114.8,3149.64) 3125.79,3154.76 3134.06,3154.76 ccw(c3145.05,3149.64)
  region net MUX_EN_PWM: 3102.05,3151.48 3105.31,3163.22 ccw(c3092.06,3176.47) 3110.04,3171.21 3110.04,3156.21 ccw(c3115.3,3138.23)
  region net CURRENT_SENSING_ADC: 3192.71,3181.85 3197.71,3181.85 ccw(c3202.29,3181.85) 3201.18,3177.41 3189.25,3177.41 ccw(c3188.14,3181.85)
  region net CURRENT_SENSING_ADC: 3197.71,3162.75 3192.71,3162.75 ccw(c3189.25,3160.56) 3189.25,3164.66 3201.18,3164.66 ccw(c3201.18,3160.56)
  region net GND: 3227.7,3173.81 3227.7,3168.81 ccw(c3227.7,3159.44) 3220.2,3165.06 3220.2,3177.41 ccw(c3227.7,3183.43)
  region net Y7: 3259.37,3205.94 3259.37,3210.94 ccw(c3255.84,3212.59) 3259.74,3212.59 3259.74,3204.32 ccw(c3256.05,3204.32)
  region net Y6: 3259.36,3221.7 3259.36,3226.7 ccw(c3256.06,3228.33) 3259.74,3228.33 3259.74,3220.07 ccw(c3256.06,3220.07)
  region net Y8: 3263.26,3245.99 3268.29,3248.03 ccw(c3279.33,3259.07) 3274.95,3244.08 3262.45,3244.08 ccw(c3262.45,3245.21)
  region net Y5: 3271.37,3269.37 3271.07,3276.74 ccw(c3274.82,3280.49) 3275.31,3275.21 3275.31,3262.71 ccw(c3260.33,3258.33)
  region net VCC: 3291.2,3289.94 3299.2,3289.94 ccw(c3836.56,3289.94) 3299.33,3277.94 3291.06,3277.94 ccw(c2753.84,3289.94)
  region net Y3: 3308.44,3282.94 3313.44,3282.94 ccw(c3321.91,3282.94) 3315.07,3277.94 3306.8,3277.94 ccw(c3299.97,3282.94)
  region net Y2: 3324.02,3285.44 3329.02,3285.44 ccw(c3345.57,3285.44) 3330.82,3277.94 3322.55,3277.94 ccw(c3304.16,3285.44)
  region net Y1: 3337.85,3248.03 3343.39,3246.5 ccw(c3344.49,3245.41) 3343.69,3244.08 3331.19,3244.08 ccw(c3326.81,3259.07)
  region net Y4: 3346.89,3226.7 3346.89,3221.7 ccw(c3349.35,3220.07) 3346.39,3220.07 3346.39,3228.33 ccw(c3349.35,3228.33)
  region net GND: 3350.6,3195.21 3350.6,3190.21 ccw(c3350.6,3183.99) 3346.39,3188.57 3346.39,3196.84 ccw(c3350.6,3201.43)
  region net AY2: 3334,3155.8 3330.93,3150.39 ccw(c3319.86,3139.32) 3322.55,3154.74 3330.82,3165.35 ccw(c3346.73,3165.35)
  region net AY1: 3313.94,3151.62 3307.94,3151.62 ccw(c3303.09,3151.62) 3306.8,3154.74 3315.07,3154.74 ccw(c3318.79,3151.62)
  region net AY0: 3298.2,3149.86 3292.2,3149.86 ccw(c3281.15,3149.86) 3291.06,3154.74 3299.33,3154.74 ccw(c3309.25,3149.86)
  region net SWDIO: 3165.83,3058.19 3177.24,3053.85 ccw(c3185.04,3063.27) 3185.04,3051.05 3172.98,3051.05 3169.29,3051.05 ccw(c3157.28,3049.64)
  region net GND: 3227.67,3064.55 3236.67,3064.55 ccw(c3264.57,3064.55) 3240.16,3051.05 3236.67,3051.05 3227.67,3051.05 3224.41,3051.05 ccw(c3198.12,3064.55)
  region net SWDCLK: 3199.98,3058.55 3204.98,3058.55 ccw(c3214.36,3058.55) 3208.73,3051.05 3204.98,3051.05 3199.98,3051.05 3196.85,3051.05 ccw(c3189.43,3058.55)
  region net $1N29965: 3359.39,3058.97 3359.39,3052.97 ccw(c3359.39,3041.72) 3350.39,3048.47 3350.39,3052.97 3350.39,3058.97 3350.39,3063.47 ccw(c3359.39,3070.22)
  region net $1N29965: 3353.6,3052.97 3353.6,3058.97 ccw(c3353.6,3081.01) 3362.6,3060.89 3362.6,3058.97 3362.6,3052.97 3362.6,3048.47 ccw(c3353.6,3041.72)
  region net GND: 3255.34,3138.32 3264.34,3138.32 ccw(c3272.41,3138.32) 3267.72,3131.75 3264.34,3131.75 3255.34,3131.75 3251.97,3131.75 ccw(c3247.27,3138.32)
  region net GND: 3264.34,3104.15 3255.34,3104.15 ccw(c3251.97,3102.33) 3251.97,3106.16 3255.34,3106.16 3264.34,3106.16 3267.72,3106.16 ccw(c3267.72,3102.33)
  region net $1N29971: 3050.06,3119.9 3050.06,3125.9 ccw(c3050.06,3137.15) 3059.06,3130.4 3059.06,3125.9 3059.06,3119.9 3059.06,3115.4 ccw(c3050.06,3108.65)
  region net AX1: 3146.61,3140.45 3152.61,3140.45 ccw(c3163.27,3140.45) 3157.11,3131.75 3152.61,3131.75 3146.61,3131.75 3142.11,3131.75 ccw(c3135.95,3140.45)
  region net AY1: 3331.46,3131.85 3336.87,3134.94 ccw(c3346.41,3147.66) 3346.41,3131.75 3340.05,3131.75 3334.65,3128.67 3334.65,3122.31 ccw(c3318.74,3122.31)
  region net AX2: 3174.32,3140.75 3180.32,3140.75 ccw(c3191.57,3140.75) 3184.82,3131.75 3180.32,3131.75 3174.32,3131.75 3169.82,3131.75 ccw(c3163.07,3140.75)
  region net AX0: 3118.82,3140.75 3124.82,3140.75 ccw(c3136.07,3140.75) 3129.32,3131.75 3124.82,3131.75 3118.82,3131.75 3114.32,3131.75 ccw(c3107.57,3140.75)
  region net CURRENT_SENSING_ADC: 3230.12,3139.25 3235.12,3139.25 ccw(c3244.5,3139.25) 3238.87,3131.75 3235.12,3131.75 3230.12,3131.75 3226.37,3131.75 ccw(c3220.75,3139.25)
  region net AY2: 3359.42,3131.19 3364.16,3134.94 ccw(c3373.71,3147.66) 3373.71,3131.75 3367.34,3131.75 3362.6,3128.01 3362.6,3121.65 ccw(c3346.69,3121.65)
  region net $1N29971: 3055.85,3125.9 3055.85,3119.9 ccw(c3055.85,3108.65) 3046.85,3115.4 3046.85,3119.9 3046.85,3125.9 3046.85,3130.4 ccw(c3055.85,3137.15)
  region net SWDIO: 3117.6,3069.34 3117.6,3064.34 3116.36,3064.23 3115.35,3063.92 3114.53,3063.44 3113.81,3062.81 3112.43,3061.25 3110.71,3059.45 3110.71,3074.22 3112.43,3072.43 3113.81,3070.86 3114.53,3070.24 3115.35,3069.76 3116.36,3069.45
  region net X5: 3071.32,3309.04 3066.32,3316.2 3066.25,3317.16 3066.04,3318.05 3065.37,3319.66 3064.6,3321.27 3063.98,3323.09 3076.9,3315.93 3075.86,3315.47 3074.85,3314.85 3073.91,3314.09 3073.07,3313.22 3072.35,3312.25 3071.8,3311.22 3071.45,3310.14
  region net X7: 3078.55,3259.76 3074.5,3256.74 3073.53,3257.56 3072.62,3258.05 3071.72,3258.29 3070.8,3258.36 3068.79,3258.24 3066.3,3258.29 3077.25,3268.19 3077.11,3265.71 3076.96,3263.58 3077.03,3262.6 3077.28,3261.64 3077.77,3260.7
  region net X8: 3078.65,3226.76 3075.11,3223.22 3074.16,3224.02 3073.23,3224.51 3072.3,3224.75 3071.35,3224.82 3069.28,3224.69 3066.79,3224.64 3077.23,3235.08 3077.18,3232.59 3077.05,3230.51 3077.11,3229.56 3077.36,3228.64 3077.85,3227.71
  region net VCC: 3299.2,3296.41 3291.2,3286.77 3291.12,3289.17 3290.7,3291.31 3290.28,3292.19 3289.68,3292.9 3288.85,3293.4 3287.77,3293.66 3298.64,3303.3 3298.7,3301.25 3298.9,3299.86 3299.1,3298.46
  region net X5: 3215.97,3468.13 3212.43,3464.59 3211.48,3465.39 3210.55,3465.88 3209.62,3466.13 3208.67,3466.19 3206.6,3466.06 3204.11,3466.01 3214.55,3476.45 3214.5,3473.96 3214.37,3471.89 3214.43,3470.94 3214.68,3470.01 3215.17,3469.08
  region net X7: 3216.26,3443.13 3216.4,3435.93 3215.5,3436.65 3214.5,3437.15 3213.42,3437.45 3212.28,3437.58 3209.92,3437.41 3207.58,3436.85 3213.68,3450.3 3214.25,3448.53 3214.72,3446.54 3215.31,3444.64 3215.73,3443.82
  region net X8: 3215.42,3419.04 3215.42,3414.04 3214.77,3413.88 3214.19,3413.44 3213.16,3412.05 3212.21,3410.43 3211.23,3409.15 3211.23,3423.92 3212.21,3422.64 3213.16,3421.02 3214.19,3419.63 3214.77,3419.2
  region net X6: 3239.94,3384.92 3243.81,3379.92 3242.64,3379.8 3241.59,3379.45 3240.66,3378.91 3239.81,3378.21 3238.29,3376.45 3236.92,3374.43 3233.05,3388.68 3234.63,3387.69 3236.41,3386.45 3238.24,3385.38 3239.11,3385.05
  region net GND: 3367.89,3366.04 3364.36,3362.51 3363.76,3362.88 3362.97,3363.05 3361.06,3363 3359.05,3362.71 3357.37,3362.59 3367.8,3373.03 3367.68,3371.35 3367.4,3369.34 3367.34,3367.42 3367.52,3366.64
  region net SWDCLK: 3204.98,3049.75 3199.98,3051.63 3199.88,3052.92 3199.6,3053.91 3199.17,3054.68 3198.61,3055.33 3197.2,3056.63 3196.41,3057.46 3195.59,3058.52 3210.23,3056.64 3208.3,3055.08 3206.62,3053.64 3205.95,3052.85 3205.43,3051.97 3205.1,3050.95
  region net GND: 3193.14,3091.75 3193.14,3082.75 3191.37,3082.5 3189.49,3081.85 3187.71,3080.93 3186.25,3079.87 3186.25,3094.63 3187.71,3093.57 3189.49,3092.65 3191.37,3092
  region net X6: 3189.11,3301.05 3185.57,3297.51 3184.62,3298.31 3183.69,3298.8 3182.76,3299.04 3181.81,3299.11 3179.74,3298.98 3177.25,3298.93 3187.69,3309.37 3187.64,3306.88 3187.51,3304.8 3187.57,3303.85 3187.82,3302.93 3188.31,3302
  region net CURRENT_SENSING_ADC: 3123.52,3294.18 3124.5,3286.13 3123.61,3286.83 3122.61,3287.34 3121.5,3287.66 3120.33,3287.82 3117.93,3287.68 3115.67,3287.04 3120.57,3300.97 3121.29,3299.24 3121.84,3297.42 3122.48,3295.68 3122.93,3294.89
  region net CURRENT_SENSING_ADC: 3199.2,3182.3 3195.66,3185.83 3196.46,3186.79 3196.95,3187.72 3197.2,3188.64 3197.26,3189.59 3197.13,3191.67 3197.08,3194.16 3207.52,3183.72 3205.03,3183.77 3202.96,3183.9 3202.01,3183.83 3201.08,3183.59 3200.15,3183.1
  region net GND: 3227.67,3055.75 ccw(c3182.67,3055.75) 3218.67,3082.75 3232.17,3087.25 3242.94,3082.75 ccw(c3297.98,3055.75) 3236.67,3055.75
  region net GND: 3232.72,3178.84 cw(c3217.72,3198.73) 3217.72,3173.81 3216.96,3168.81 3232.47,3168.01 3238.36,3173.33 3237.72,3178.84
  region net GND: 3232.72,3178.84 3237.72,3178.84 ccw(c3255.61,3178.84) 3238.63,3173.23 3232.75,3170.97 ccw(c1759.6,3170.97)
  region net VBAT_ADC: 3202.67,3135.79 3207.67,3135.79 ccw(c3211.72,3135.79) 3211.42,3131.75 3207.67,3131.75 3202.67,3131.75 3198.92,3131.75 ccw(c3198.63,3135.79)
  region net VBAT_ADC: 3207.67,3122.39 3202.67,3122.39 3202.56,3123.63 3202.25,3124.63 3201.77,3125.46 3201.15,3126.18 3199.58,3127.55 3197.79,3129.28 3212.56,3129.28 3210.76,3127.55 3209.2,3126.18 3208.57,3125.46 3208.09,3124.63 3207.78,3123.63
  region net VCC: 3283.45,3146.71 3275.45,3146.71 ccw(c3034.94,3146.71) 3275.31,3154.74 3283.58,3154.74 ccw(c3523.96,3146.71)
  region net VCC: 3283.4,3138.76 3291.4,3138.76 ccw(c3299.67,3138.76) 3295.28,3131.75 3291.4,3131.75 3283.4,3131.75 3279.53,3131.75 ccw(c3275.13,3138.76)
  region net GND: 3124.28,3518.71 3134.28,3518.71 3134.46,3516.98 3134.95,3515.07 3135.7,3513.27 3136.66,3511.82 3121.9,3511.82 3122.85,3513.27 3123.61,3515.07 3124.1,3516.98

## Silkscreen, mask and mechanical layers (free items; w line width, h text height)
Top Solder Mask Layer:
  region: 3188.55,3617.68 3220.74,3617.68 3220.74,3572.07 3188.55,3572.07
Mech6:
  lines w0.39: 3151.57,3437.36 3257.87,3437.36 ; 3204.72,3566.93 3204.72,3625.98 ; 3151.57,3342.87 3151.57,3531.85 3257.87,3531.85 3257.87,3342.87 3151.57,3342.87